# EAGLE board main (EAGLE 9.6.2)
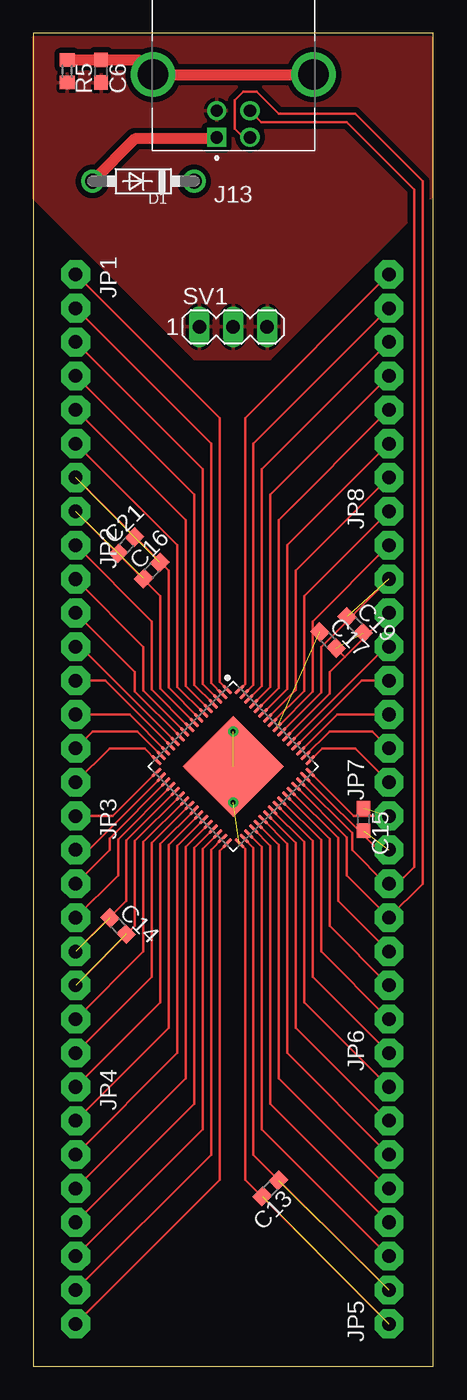
[diagram p0: board, top side]
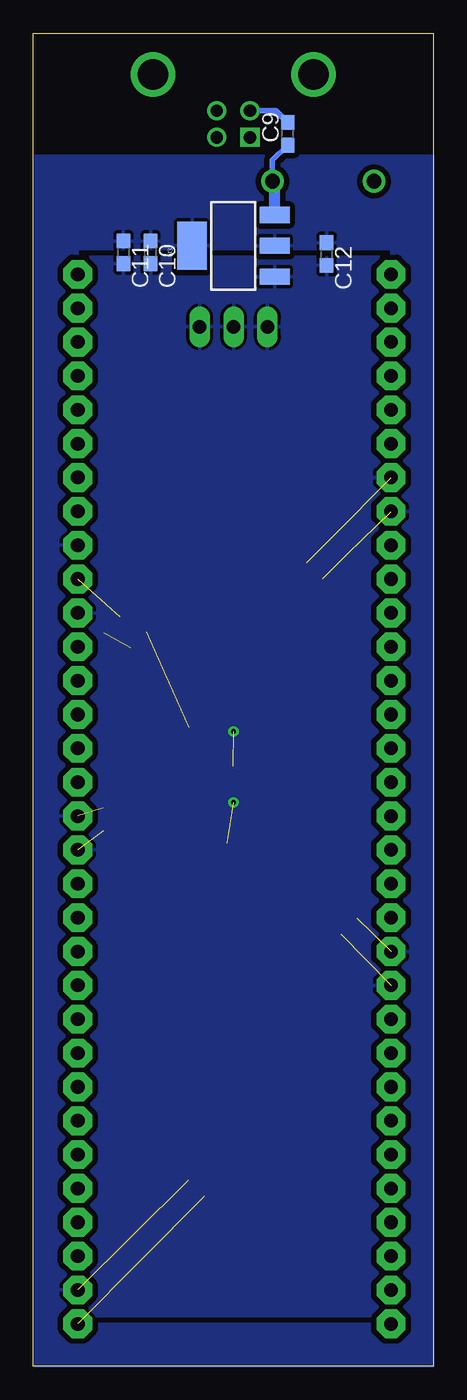
[diagram p1: board, bottom side, seen from below]

Size 30 x 100 mm. Coordinates in mm from the lower left corner, seen from the top.
Outline: 0,0 30,0 30,100 0,100 0,0
Copper layers (1*16): Top 0.035mm / dielectric 1.5mm / Bottom 0.035mm
Design rules "default *": minimum track width 6mil, minimum drill 0.35mm, track to track 8mil, track to pad 8mil, pad to pad 8mil, via to via 8mil, smd to smd 8mil, copper to edge 0mil, drill to drill 16mil, minimum pad ring 10mil, minimum via ring 8mil, stop-mask expansion 4mil, vias tented up to drill 0mil, thermal gap 10mil

## Footprints (pad centres in the part's own frame; a part is rotated, then mirrored left to right if it is on the bottom)
C0603 = smd 1.1 x 1: 1 -0.85,0; 2 0.85,0
DO41-7.6 = drill 1.1 pad 1.7: A 3.81,0; C -3.81,0
61729-1011BLF = drill 0.92 square: 1 1.25,4.71 | drill 0.92: 2 -1.25,4.71; 3 -1.25,2.71; 4 1.25,2.71 | drill 2.3: SH1 -6.02,0; SH2 6.02,0
1X08-CLEANBIG = drill 1.016 pad 2.159 octagon: 1 -8.89,0; 2 -6.35,0; 3 -3.81,0; 4 -1.27,0; 5 1.27,0; 6 3.81,0; 7 6.35,0; 8 8.89,0
R0603 = smd 1 x 1.1: 1 -0.85,0; 2 0.85,0
MA03-1 = drill 1.016 long: 1 -2.54,0; 2 0,0; 3 2.54,0
SOT223 = smd 1.219 x 2.235: 1 -2.311,-3.099; 2 0,-3.099; 3 2.311,-3.099 | smd 3.6 x 2.2: 4 0,3.099
QFN50P900X900X100-65T535 = smd 0.911 x 0.264: 1 -4.401,3.75; 2 -4.401,3.25; 3 -4.401,2.75; 4 -4.401,2.25; 5 -4.401,1.75; 6 -4.401,1.25; 7 -4.401,0.75; 8 -4.401,0.25; 9 -4.401,-0.25; 10 -4.401,-0.75; 11 -4.401,-1.25; 12 -4.401,-1.75; 13 -4.401,-2.25; 14 -4.401,-2.75; 15 -4.401,-3.25; 16 -4.401,-3.75; 33 4.401,-3.75; 34 4.401,-3.25; 35 4.401,-2.75; 36 4.401,-2.25; 37 4.401,-1.75; 38 4.401,-1.25; 39 4.401,-0.75; 40 4.401,-0.25; 41 4.401,0.25; 42 4.401,0.75; 43 4.401,1.25; 44 4.401,1.75; 45 4.401,2.25; 46 4.401,2.75; 47 4.401,3.25; 48 4.401,3.75 | smd 0.264 x 0.911: 17 -3.75,-4.401; 18 -3.25,-4.401; 19 -2.75,-4.401; 20 -2.25,-4.401; 21 -1.75,-4.401; 22 -1.25,-4.401; 23 -0.75,-4.401; 24 -0.25,-4.401; 25 0.25,-4.401; 26 0.75,-4.401; 27 1.25,-4.401; 28 1.75,-4.401; 29 2.25,-4.401; 30 2.75,-4.401; 31 3.25,-4.401; 32 3.75,-4.401; 49 3.75,4.401; 50 3.25,4.401; 51 2.75,4.401; 52 2.25,4.401; 53 1.75,4.401; 54 1.25,4.401; 55 0.75,4.401; 56 0.25,4.401; 57 -0.25,4.401; 58 -0.75,4.401; 59 -1.25,4.401; 60 -1.75,4.401; 61 -2.25,4.401; 62 -2.75,4.401; 63 -3.25,4.401; 64 -3.75,4.401 | smd 5.35 x 5.35: 65 0,0

## Placement (x,y rotation side)
C6  4n7  [C0603]  5.08,97.16 270 top
C9  10u  [C0603]  10.92,92.46 90 bottom
C10  100n  [C0603]  21.21,83.57 270 bottom
C11  4u7  [C0603]  23.24,83.57 270 bottom
C12  1u  [C0603]  8,83.44 270 bottom
C13  100n  [C0603]  17.78,13.34 225 top
C14  100n  [C0603]  6.35,33.02 315 top
C15  100n  [C0603]  24.77,41.02 270 top
C16  1u  [C0603]  8.89,59.69 45 top
C17  100n  [C0603]  22.1,54.48 315 top
C19  1u  [C0603]  24.13,55.63 315 top
C21  100n  [C0603]  6.99,61.59 45 top
D1  BAT60B  [DO41-7.6]  8.26,88.9 180 top
J13  61729-1011  [61729-1011BLF]  15,96.91 180 top
JP1  [1X08-CLEANBIG]  3.17,73.03 270 top
JP2  [1X08-CLEANBIG]  3.17,52.7 270 top
JP3  [1X08-CLEANBIG]  3.17,32.38 270 top
JP4  [1X08-CLEANBIG]  3.17,12.06 270 top
JP5  [1X08-CLEANBIG]  26.67,12.06 90 top
JP6  [1X08-CLEANBIG]  26.67,32.38 90 top
JP7  [1X08-CLEANBIG]  26.67,52.7 90 top
JP8  [1X08-CLEANBIG]  26.67,73.03 90 top
R5  1M  [R0603]  2.54,97.16 270 top
SV1  [MA03-1]  14.99,77.98 0 top
U3  AMS1117  [SOT223]  15,84.06 90 bottom
U$1  [QFN50P900X900X100-65T535]  15,45 315 top

## Library data of the parts
C6 C9-C17 C19 C21 = rcl; SPICEPREFIX: C
D1 = diode
J13 = Connector_USB; CATEGORY: Connector; CONTACTS: 4; CURRENT_RATING: 1A; DESCRIPTION: CONN RCPT USB2.0 TYPEB 4POS R/A; GENDER: Receptacle; MANUFACTURER: Amphenol ICC (FCI); MOUNT_TYPE: R/A; MPN: 61729-1011BLF; OPERATING_TEMP: -55°C to 85°C; PART_STATUS: Active; ROHS_COMPLIANT: RoHS Compliant; SERIES: 61729; SUB-CATEGORY: USB; TYPE: USB-B
JP1-JP8 = larger_pad_header
R5 = rcl; SPICEPREFIX: R
SV1 = con-lstb; OC_FARNELL: unknown; OC_NEWARK: unknown
U3 = SparkFun-IC-Power; PROD_ID: VREG-08170
U$1 = atsamd21j18a

## Nets
+3V3: C10.1 C11.1 C12.1 C13.1 C14.1 C15.1 C16.1 C17.1 C21.1 JP1.8 JP3.5 JP5.2 JP6.8 JP7.8 U3.2 U3.4 U$1.8 U$1.21 U$1.34 U$1.48 U$1.56
GND: C6.2 C9.2 C10.2 C11.2 C12.2 C13.2 C14.2 C15.2 C16.2 C17.2 C19.2 C21.2 J13.4 JP1.7 JP3.6 JP5.1 JP6.7 JP7.6 R5.2 SV1.1 SV1.2 SV1.3 U3.1 U$1.7 U$1.22 U$1.33 U$1.47 U$1.54 U$1.65
P1: JP1.1 U$1.1
P2: JP1.2 U$1.2
P3: JP1.3 U$1.3
P4: JP1.4 U$1.4
P5: JP1.5 U$1.5
P6: JP1.6 U$1.6
P9: JP2.1 U$1.9
P10: JP2.2 U$1.10
P11: JP2.3 U$1.11
P12: JP2.4 U$1.12
P13: JP2.5 U$1.13
P14: JP2.6 U$1.14
P15: JP2.7 U$1.15
P16: JP2.8 U$1.16
P17: JP3.1 U$1.17
P18: JP3.2 U$1.18
P19: JP3.3 U$1.19
P20: JP3.4 U$1.20
P23: JP3.7 U$1.23
P24: JP3.8 U$1.24
P25: JP4.1 U$1.25
P26: JP4.2 U$1.26
P27: JP4.3 U$1.27
P28: JP4.4 U$1.28
P29: JP4.5 U$1.29
P30: JP4.6 U$1.30
P31: JP4.7 U$1.31
P32: JP4.8 U$1.32
P35: JP5.3 U$1.35
P36: JP5.4 U$1.36
P37: JP5.5 U$1.37
P38: JP5.6 U$1.38
P39: JP5.7 U$1.39
P40: JP5.8 U$1.40
P41: JP6.1 U$1.41
P42: JP6.2 U$1.42
P43: JP6.3 U$1.43
P44: JP6.4 U$1.44
P49: JP7.1 U$1.49
P50: JP7.2 U$1.50
P51: JP7.3 U$1.51
P52: JP7.4 U$1.52
P53: JP7.5 U$1.53
P57: JP8.1 U$1.57
P58: JP8.2 U$1.58
P59: JP8.3 U$1.59
P60: JP8.4 U$1.60
P61: JP8.5 U$1.61
P62: JP8.6 U$1.62
P63: JP8.7 U$1.63
P64: JP8.8 U$1.64
USB_5V: C9.1 D1.C U3.3
USB_DN: J13.2 JP6.5 U$1.45
USB_DP: J13.3 JP6.6 U$1.46
USB_SH: C6.1 J13.SH1 J13.SH2 R5.1
USB_VB: D1.A J13.1
VDDCO: C19.1 JP7.7 U$1.55

## Tracks (layer width: path | path; a pad name or v marks a point on that pad's centre or on a via)
+3V3  (6 unrouted)
  Top 0.203: JP5.2 16.51,15.88 16.51,38.89 U$1.34 | JP7.8 20.95,55.88 20.95,50.6 U$1.56 | JP3.5 6.99,34.92 6.99,39.46 U$1.21 | U$1.48 24.03,41.27 JP6.8 | JP1.8 9.53,57.78 9.53,50.83 U$1.8
  pour Bottom (isolate 0.406): 3.17,83.82 3.17,3.17 26.67,3.17 26.67,83.82 29.84,83.82 29.84,0 0,0 0,83.82
  pour Bottom (isolate 0.406): 0,90.81 29.84,90.81 29.84,83.82 0,83.82
GND  (via drill 0.35)  (8 unrouted)
  Top 0.203: JP5.1 15.88,13.97 15.88,38.82 U$1.33 | JP3.6 7.62,33.02 7.62,39.39 U$1.22 | JP1.7 10.16,59.69 10.16,50.9 U$1.7 | 23.37,53.21 22.23,52.07 22.23,50.46 U$1.54 | 23.37,53.21 JP7.6 | JP6.7 25.86,38.73 U$1.47 20.1,44.5 | C17.2 23.37,53.21 | 23.37,53.21
  Bottom 0.406: C9.2 11.81,94.19 J13.4
  other vias: 14.99,42.29 14.99,47.62
  pour Bottom (isolate 0.406, rank 2): 3.17,83.82 3.17,3.17 26.67,3.17 26.67,83.82
  pour Top (isolate 0.406): 0,99.69 29.84,99.69 29.84,87.63 17.78,75.56 12.06,75.56 11.43,76.2 0,87.63 0,90.81
P1
  Top 0.203: JP1.1 13.97,71.12 13.97,51.33 U$1.1
P2
  Top 0.203: JP1.2 13.34,69.22 13.34,51.26 U$1.2
P3
  Top 0.203: JP1.3 12.7,67.31 12.7,51.19 U$1.3
P4
  Top 0.203: JP1.4 12.06,65.41 12.06,51.12 U$1.4
P5
  Top 0.203: JP1.5 11.43,63.5 11.43,52.07 11.43,52.01 11.43,51.05 U$1.5
P6
  Top 0.203: JP1.6 10.79,61.59 10.79,51.44 10.79,51.3 10.79,50.97 U$1.6
P9
  Top 0.203: JP2.1 8.89,55.88 8.89,50.76 U$1.9
P10
  Top 0.203: JP2.2 8.26,53.98 8.26,50.68 U$1.10
P11
  Top 0.203: JP2.3 7.62,52.07 7.62,50.61 U$1.11
P12
  Top 0.203: U$1.12 3.55,53.98 JP2.4
P13
  Top 0.203: U$1.13 5.38,51.44 JP2.5
P14
  Top 0.203: U$1.14 7.22,48.9 JP2.6
P15
  Top 0.203: U$1.15 7.78,47.62 4.45,47.62 JP2.7
P16
  Top 0.203: U$1.16 8.34,46.35 5.71,46.35 JP2.8
P17
  Top 0.203: U$1.17 5.97,41.27 JP3.1
P18
  Top 0.203: U$1.18 4.14,38.73 JP3.2
P19
  Top 0.203: 3.17,36.27 JP3.3 5.71,38.73 5.71,39.6 U$1.19
P20
  Top 0.203: JP3.4 6.35,36.83 6.35,38.1 6.35,38.11 6.35,39.53 U$1.20
P23
  Top 0.203: JP3.7 8.26,31.11 8.26,39.32 U$1.23
P24
  Top 0.203: JP3.8 8.89,29.21 8.89,39.24 U$1.24
P25
  Top 0.203: JP4.1 9.53,27.3 9.53,39.17 U$1.25
P26
  Top 0.203: JP4.2 10.16,25.4 10.16,37.47 10.16,37.67 10.16,39.1 U$1.26
P27
  Top 0.203: JP4.3 10.79,23.5 10.79,37.47 10.79,37.6 10.79,39.03 U$1.27
P28
  Top 0.203: JP4.4 11.43,21.59 11.43,37.47 11.43,37.53 11.43,38.95 U$1.28
P29
  Top 0.203: JP4.5 12.06,19.68 12.06,38.88 U$1.29
P30
  Top 0.203: JP4.6 12.7,17.78 12.7,38.81 U$1.30
P31
  Top 0.203: JP4.7 13.34,15.88 13.34,38.74 U$1.31
P32
  Top 0.203: JP4.8 13.97,13.97 13.97,38.67 U$1.32
P35
  Top 0.203: JP5.3 17.14,17.78 17.14,38.97 U$1.35
P36
  Top 0.203: JP5.4 17.78,19.68 17.78,39.04 U$1.36
P37
  Top 0.203: JP5.5 18.41,21.59 18.41,37.47 18.41,37.53 18.41,39.11 U$1.37
P38
  Top 0.203: JP5.6 19.05,23.5 19.05,37.47 19.05,37.6 19.05,39.18 U$1.38
P39
  Top 0.203: JP5.7 19.68,25.4 19.68,37.47 19.68,37.67 19.68,39.25 U$1.39
P40
  Top 0.203: JP5.8 20.32,27.3 20.32,39.33 U$1.40
P41
  Top 0.203: JP6.1 20.95,29.21 20.95,39.4 U$1.41
P42
  Top 0.203: JP6.2 21.59,31.11 21.59,39.47 U$1.42
P43
  Top 0.203: JP6.3 22.23,33.02 22.23,39.54 U$1.43
P44
  Top 0.203: JP6.4 22.86,34.92 22.86,39.62 U$1.44
P49
  Top 0.203: U$1.49 21.66,46.35 24.13,46.35 JP7.1
P50
  Top 0.203: U$1.50 22.22,47.62 25.4,47.62 JP7.2
P51
  Top 0.203: U$1.51 22.78,48.9 JP7.3
P52
  Top 0.203: 26.04,51.44 JP7.4 24.62,51.44 U$1.52
P53
  Top 0.203: U$1.53 26.45,53.98 JP7.5
P57
  Top 0.203: JP8.1 20.32,57.78 20.32,50.67 U$1.57
P58
  Top 0.203: JP8.2 19.68,59.69 19.68,50.75 U$1.58
P59
  Top 0.203: JP8.3 19.05,61.59 19.05,52.07 19.05,51.93 19.05,50.82 U$1.59
P60
  Top 0.203: JP8.4 18.41,63.5 18.41,52.07 18.41,52.01 18.41,50.89 U$1.60
P61
  Top 0.203: JP8.5 17.78,65.41 17.78,50.96 U$1.61
P62
  Top 0.203: JP8.6 17.14,67.31 17.14,51.03 U$1.62
P63
  Top 0.203: JP8.7 16.51,69.22 16.51,51.11 U$1.63
P64
  Top 0.203: JP8.8 15.88,71.12 15.88,51.18 U$1.64
USB_5V
  Bottom 0.406: D1.C 12.06,90.46 C9.1
  Bottom 0.813: U3.3 11.9,88.74 D1.C
USB_DN
  Top 0.203: U$1.45 23.5,39.69 23.5,36.83 JP6.5 29.21,36.2 29.21,88.9 24.13,93.98 18.41,93.98 16.76,95.63 15.74,95.63 15.1,95 15.1,92.85 15.76,92.19 J13.2
USB_DP
  Top 0.203: 26.67,36.27 JP6.6 | U$1.46 23.9,39.99 23.9,38.73 26.44,36.2 JP6.6 | JP6.6 27.3,36.2 28.57,37.47 28.57,88.27 23.5,93.34 17.1,93.34 J13.3
USB_SH
  Top 0.813: R5.1 C6.1 7.88,98 J13.SH2 J13.SH1
USB_VB
  Top 0.813: J13.1 13.63,92.08 7.62,92.08 D1.A
VDDCO  (1 unrouted)
  Top 0.203: JP7.7 21.59,53.98 21.59,50.53 U$1.55